# Altium PCB ATMEGA848-S52贴片.PcbDoc
Units mil, origin at the board's own origin, x right, y up, seen from the top; angles counter-clockwise.
Board outline 6000 x 4000 mil, 2 copper layers (Top Layer, Bottom Layer); 2 components, 39 nets, 72 pads, 14 vias.
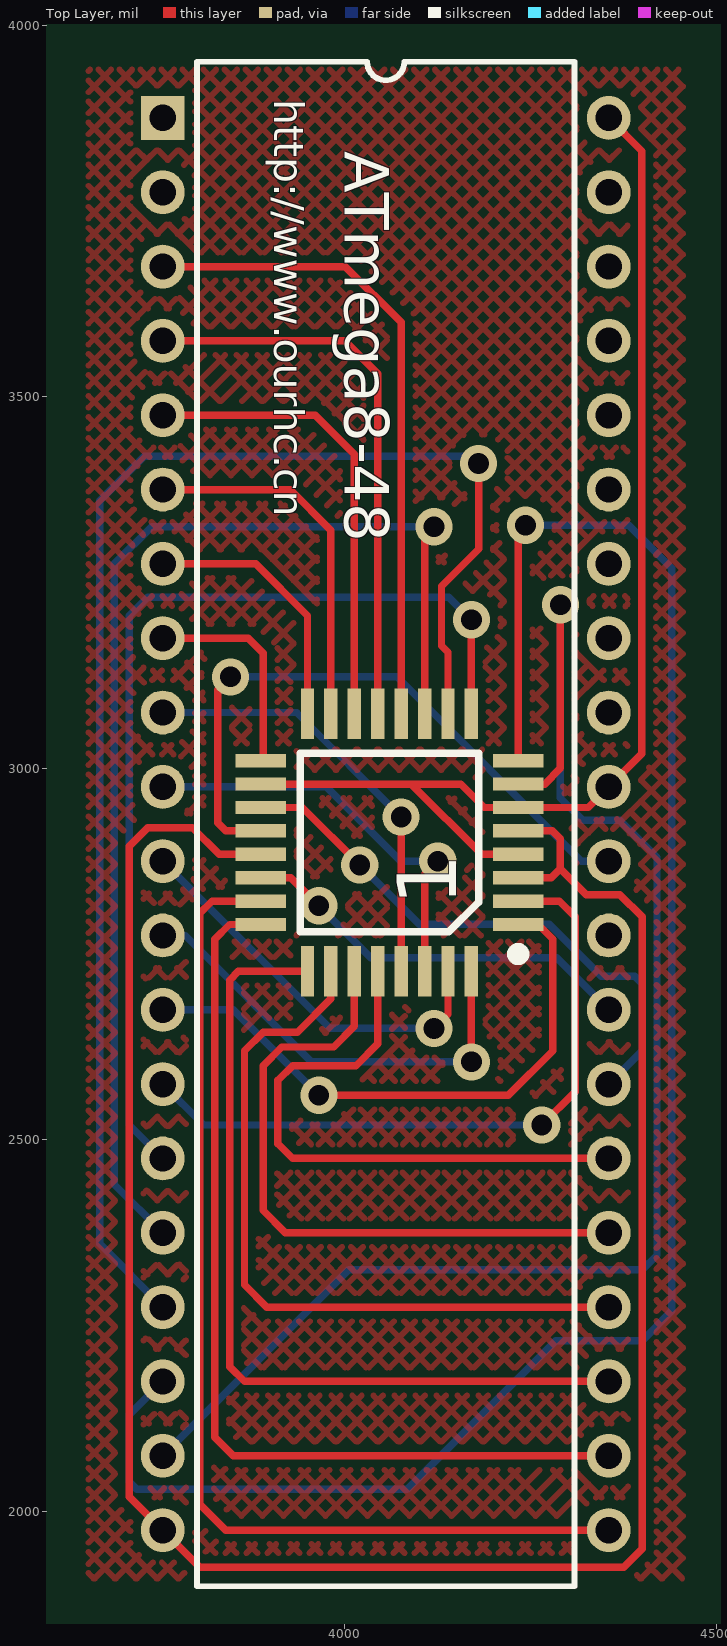
[diagram p0: Top Layer view]
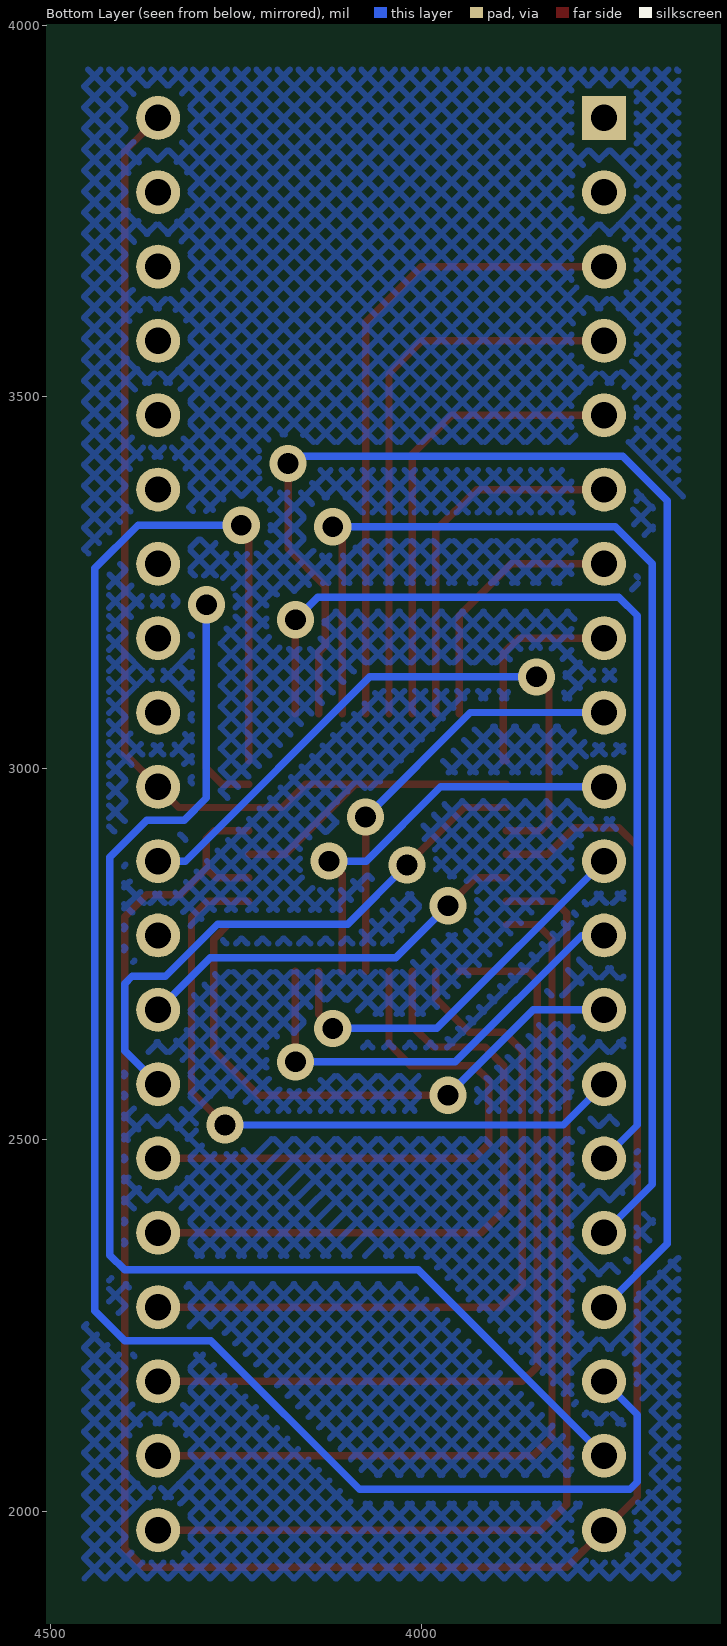
[diagram p1: Bottom Layer view, seen from below]

## Layer stack, top to bottom
Top Layer: signal copper 1.4
Dielectric: dielectric 12.6, FR-4, Dk 4.8
Bottom Layer: signal copper 1.4

## Board outline
1000,1000 7000,1000 7000,5000 1000,5000

## Design rules (kind name [scope] priority, off if disabled: settings)
Clearance [All] p1: gap=10
ComponentClearance [All] p1: gap=10 collisioncheckmode=3 verticalgap=10
PolygonConnect [All] p1: connectstyle=Relief reliefconductorwidth=10 reliefentries=4 polygonreliefangle="90 Angle"
RoutingVias [All] p1: holewidth=28 width=50 viastyle="Through Hole" minholewidth=28 minwidth=50 maxholewidth=28 maxwidth=50
SolderMaskExpansion [All] p1: expansion=4
TestPointUsage [All] p1: valid=0 allowmultiple=FALSE
Testpoint [All] p1: side=15 testpointundercomponent=TRUE minsize=40 maxsize=100 preferedsize=60 minholesize=0 maxholesize=40 preferedholesize=32 testpointgrid=1 style=1023 order=0123456789
Width [All] p1: maxlimit=10 minlimit=10 preferedwidth=10
17 further rules are at their usual default settings.

## Components (designator, comment, footprint, x,y, rotation, side; value= is the part's Value field where it differs from the comment)
ATmega8-48 "ATmega8-16AI" TQFP-32_0.8/7×7mm 4060,2900 r180 top
U1 "AT89S52" DIP-40 4055,2925 r270 top

## Footprints (in the part's own frame and the unit in brackets; to place one, negate y for a bottom-side part, rotate by r counter-clockwise, add the part's x,y. Pads: shape width x height; smd on the part's side, far side on the other; paste and mask are expansions set on the pad)
DIP-40 [mm] "DIP; 40 Leads; Row Spacing 15.24 mm; Pitch 2.54 mm"
  rect 1.5x1.5 hole 0.9: 1(-24.13,-7.62)
  round 1.5 hole 0.9: 2(-21.59,-7.62) 3(-19.05,-7.62) 4(-16.51,-7.62) 5(-13.97,-7.62) 6(-11.43,-7.62) 7(-8.89,-7.62) 8(-6.35,-7.62) 9(-3.81,-7.62) 10(-1.27,-7.62) 11(1.27,-7.62) 12(3.81,-7.62) 13(6.35,-7.62) 14(8.89,-7.62) 15(11.43,-7.62) 16(13.97,-7.62) 17(16.51,-7.62) 18(19.05,-7.62) 19(21.59,-7.62) 20(24.13,-7.62) 21(24.13,7.62) 22(21.59,7.62) 23(19.05,7.62) 24(16.51,7.62) 25(13.97,7.62) 26(11.43,7.62) 27(8.89,7.62) 28(6.35,7.62) 29(3.81,7.62) 30(1.27,7.62) 31(-1.27,7.62) 32(-3.81,7.62) 33(-6.35,7.62) 34(-8.89,7.62) 35(-11.43,7.62) 36(-13.97,7.62) 37(-16.51,7.62) 38(-19.05,7.62) 39(-21.59,7.62) 40(-24.13,7.62)
  silkscreen extent -26.05,-6.45 26.05,6.45
TQFP-32_0.8/7×7mm [mil] "引脚间距：0.8mm，长度 ：1mm 。主体外形 7×7mm，方形，边角索引"
  rect 68x18 smd: 1(-173.23,110.24) 2(-173.23,78.74) 3(-173.23,47.24) 4(-173.23,15.75) 5(-173.23,-15.75) 6(-173.23,-47.24) 7(-173.23,-78.74) 8(-173.23,-110.24) 17(173.23,-110.24) 18(173.23,-78.74) 19(173.23,-47.24) 20(173.23,-15.75) 21(173.23,15.75) 22(173.23,47.24) 23(173.23,78.74) 24(173.23,110.24)
  rect 18x68 smd: 9(-110.24,-173.23) 10(-78.74,-173.23) 11(-47.24,-173.23) 12(-15.75,-173.23) 13(15.75,-173.23) 14(47.24,-173.23) 15(78.74,-173.23) 16(110.24,-173.23) 25(110.24,173.23) 26(78.74,173.23) 27(47.24,173.23) 28(15.75,173.23) 29(-15.75,173.23) 30(-47.24,173.23) 31(-78.74,173.23) 32(-110.24,173.23)
  silkscreen extent -178,-120 120,155

## Part data
ATmega8-48: library part ATmega8-A, "8 位微处理器/32引脚"
U1: library part 8051

## Via types
v1: diameter 50, hole 28, Top Layer to Bottom Layer, 14 vias

## Nets (pads, with @x,y where several pads share a name; then routed paths per layer and width w, separated by ;. In a path a pad name is that pad's centre, name@x,y a point inside that pad or via, vN(x,y) a via of type N, cw(c..) or ccw(c..) an arc to the next point about the centre after c; other vN are vias at no path point)
ALE: ATmega8-48.20 U1.30 | length 877.3
  Top Layer w10: v1(3846,3123) 3829,3106 3829,2926.75 3840,2915.75 ATmega8-48.20
  Bottom Layer w10: v1(3846,3123) 4070.11,3123 4318.11,2875 U1.30
GND: ATmega8-48.3 ATmega8-48.5 ATmega8-48.21 U1.20 | length 2966.6
  Top Layer w10: ATmega8-48.21 3830.75,2884.25 3795,2920 3735,2920 3710,2895 3710,2020 U1.20 3805,1925 4375,1925 4400,1950 4400,2800 4370,2830 4325,2830 4290,2865 ; ATmega8-48.3 4277.76,2852.76 4290,2865 ; ATmega8-48.5 4279.25,2915.75 4290,2905 4290,2865
P0.0: U1.39
P0.1: U1.38
P0.2: U1.37
P0.3: U1.36
P0.4: U1.35
P0.5: U1.34
P0.6: U1.33
P0.7: U1.32
P1.0: U1.1
P1.1: U1.2
P1.2: ATmega8-48.12 U1.3 | length 878.6
  Top Layer w10: U1.3 4000.75,3675 4075.75,3600 ATmega8-48.12
P1.3: ATmega8-48.13 U1.4 | length 765.1
  Top Layer w10: U1.4 4000,3575 4044.25,3530.75 ATmega8-48.13
P1.4: ATmega8-48.14 U1.5 | length 628.6
  Top Layer w10: U1.5 3960,3475 4012.76,3422.24 ATmega8-48.14
P1.5: ATmega8-48.15 U1.6 | length 495.8
  Top Layer w10: U1.6 3926.26,3375 3981.26,3320 ATmega8-48.15
P1.6: ATmega8-48.16 U1.7 | length 355.7
  Top Layer w10: U1.7 3880,3275 3949.76,3205.24 ATmega8-48.16
P1.7: ATmega8-48.17 U1.8 | length 291.9
  Top Layer w10: U1.8 3870,3175 3890.45,3154.55 3890.45,3010.24 ATmega8-48.17
P2.0: ATmega8-48.23 U1.21 | length 1448
  Top Layer w10: ATmega8-48.23 3821.26,2821.26 3805,2805 3805,2010 3840,1975 U1.21
P2.1: ATmega8-48.24 U1.22 | length 1280.3
  Top Layer w10: ATmega8-48.24 3844.76,2789.76 3825,2770 3825,2100 3850,2075 U1.22
P2.2: ATmega8-48.25 U1.23 | length 1147.9
  Top Layer w10: ATmega8-48.25 3856.77,2726.77 3845,2715 3845,2195 3865,2175 U1.23
P2.3: ATmega8-48.26 U1.24 | length 999.5
  Top Layer w10: ATmega8-48.26 3981.26,2690 3936.26,2645 3890,2645 3865,2620 3865,2305 3895,2275 U1.24
P2.4: ATmega8-48.27 U1.25 | length 891.1
  Top Layer w10: ATmega8-48.27 4012.76,2652.76 3985,2625 3915,2625 3890,2600 3890,2405 3920,2375 U1.25
P2.5: ATmega8-48.28 U1.26 | length 790.5
  Top Layer w10: ATmega8-48.28 4044.25,2629.25 4015,2600 3930,2600 3910,2580 3910,2495 3930,2475 U1.26
P2.6: ATmega8-48.19 U1.27 | length 765.1
  Top Layer w10: ATmega8-48.19 3942.76,2947.24 v1(4020,2870)
  Bottom Layer w10: v1(4020,2870) 4100,2790 4275,2790 4345,2720 4390,2720 4400,2710 4400,2620 U1.27
P2.7: ATmega8-48.22 U1.28 | length 541.9
  Top Layer w10: ATmega8-48.22 3927.24,2852.76 v1(3965,2815)
  Bottom Layer w10: v1(3965,2815) 4035,2745 4285,2745 U1.28
P3.0: ATmega8-48.30 U1.10 | length 567
  Top Layer w10: ATmega8-48.30 4107.24,2857.24 v1(4125,2875)
  Bottom Layer w10: U1.10 3975,2975 4075,2875 v1(4125,2875)
P3.1: ATmega8-48.31 U1.11 | length 542.7
  Top Layer w10: v1(4120,2650) 4138.74,2668.74 ATmega8-48.31
  Bottom Layer w10: U1.11 3980,2650 v1(4120,2650)
P3.2: ATmega8-48.32 U1.12 | length 607.4
  Top Layer w10: v1(4170.24,2605) ATmega8-48.32
  Bottom Layer w10: U1.12 3785,2775 3955,2605 v1(4170.24,2605)
P3.3: ATmega8-48.1 U1.13 | length 802.4
  Top Layer w10: v1(3965,2560) 4220,2560 4280,2620 4280,2770 4260.24,2789.76 ATmega8-48.1
  Bottom Layer w10: U1.13 3850,2675 v1(3965,2560)
P3.4: ATmega8-48.2 U1.14 | length 917
  Top Layer w10: ATmega8-48.2 4288.74,2821.26 4310,2800 4310,2565 v1(4265,2520)
  Bottom Layer w10: U1.14 3810,2520 v1(4265,2520)
P3.5: ATmega8-48.9 U1.15 | length 1358.3
  Top Layer w10: ATmega8-48.9 v1(4170.24,3199.76)
  Bottom Layer w10: U1.15 3710,2520 3710,3205 3735,3230 4140,3230 v1(4170.24,3199.76)
P3.6: ATmega8-48.11 U1.16 | length 1634.7
  Top Layer w10: ATmega8-48.11 4107.24,3312.24 v1(4120,3325)
  Bottom Layer w10: U1.16 3690,2440 3690,3275 3740,3325 v1(4120,3325)
P3.7: ATmega8-48.10 U1.17 | length 2020.3
  Top Layer w10: ATmega8-48.10 4138.74,3156.26 4130,3165 4130,3245 4180,3295 v1(4180,3410)
  Bottom Layer w10: U1.17 3670,2360 3670,3360 3730,3420 4170,3420 v1(4180,3410)
PSEN: U1.29
RES: ATmega8-48.29 U1.9 | length 586.5
  Top Layer w10: ATmega8-48.29 v1(4075.75,2934.25)
  Bottom Layer w10: U1.9 3935,3075 v1(4075.75,2934.25)
VCC: ATmega8-48.4 ATmega8-48.6 ATmega8-48.18 U1.31 U1.40 | length 1612.5
  Top Layer w10: ATmega8-48.18 4089.51,2978.74 ; ATmega8-48.4 4184,2884.25 4089.51,2978.74 ; U1.40 4399.53,3830.47 4399.53,3019.53 U1.31 4327.24,2947.24 ATmega8-48.6 4187.76,2947.24 4156.26,2978.74 4089.51,2978.74
X1: ATmega8-48.7 U1.19 | length 2020.6
  Top Layer w10: ATmega8-48.7 4268.74,2978.74 4290,3000 v1(4290,3220)
  Bottom Layer w10: U1.19 4005,2325 4400,2325 4420,2345 4420,2880 4370,2930 4320,2930 4290,2960 v1(4290,3220)
X2: ATmega8-48.8 U1.18 | length 2528
  Top Layer w10: ATmega8-48.8 4233.23,3317.23 v1(4243,3327)
  Bottom Layer w10: U1.18 3710,2130 3710,2040 3720,2030 4084,2030 4284,2230 4400,2230 4440,2270 4440,3269 4382,3327 v1(4243,3327)

## Polygon pours and split planes (outlines as drawn)
no net on Top Layer (hatched 45Degree grid 20 track 8): 3655,3940 4455,3940 4455,1910 3655,1910
no net on Bottom Layer (hatched 45Degree grid 20 track 8): 3655,3940 4455,3940 4455,1910 3655,1910

## Silkscreen, mask and mechanical layers (free items; w line width, h text height)
Top Overlay:
  text "http://www.ourhc.cn" at 3905,3900 h40.31 r270
Mechanical 1:
  lines w10: 4470,1890 4470,3955 3640,3955 3640,1895 4470,1895

## Text inside footprints (layer, text, board x,y; h text height)
ATmega8-48: Top Overlay "1" at 4150,2815 h80 r90